# Altium PCB PCB1.PcbDoc (part 1 of 2)
Units mil, origin at the board's own origin, x right, y up, seen from the top; angles counter-clockwise.
Board outline 8460 x 6430 mil, 2 copper layers (Top Layer, Bottom Layer); 197 components, 213 nets, 804 pads, 61 vias.
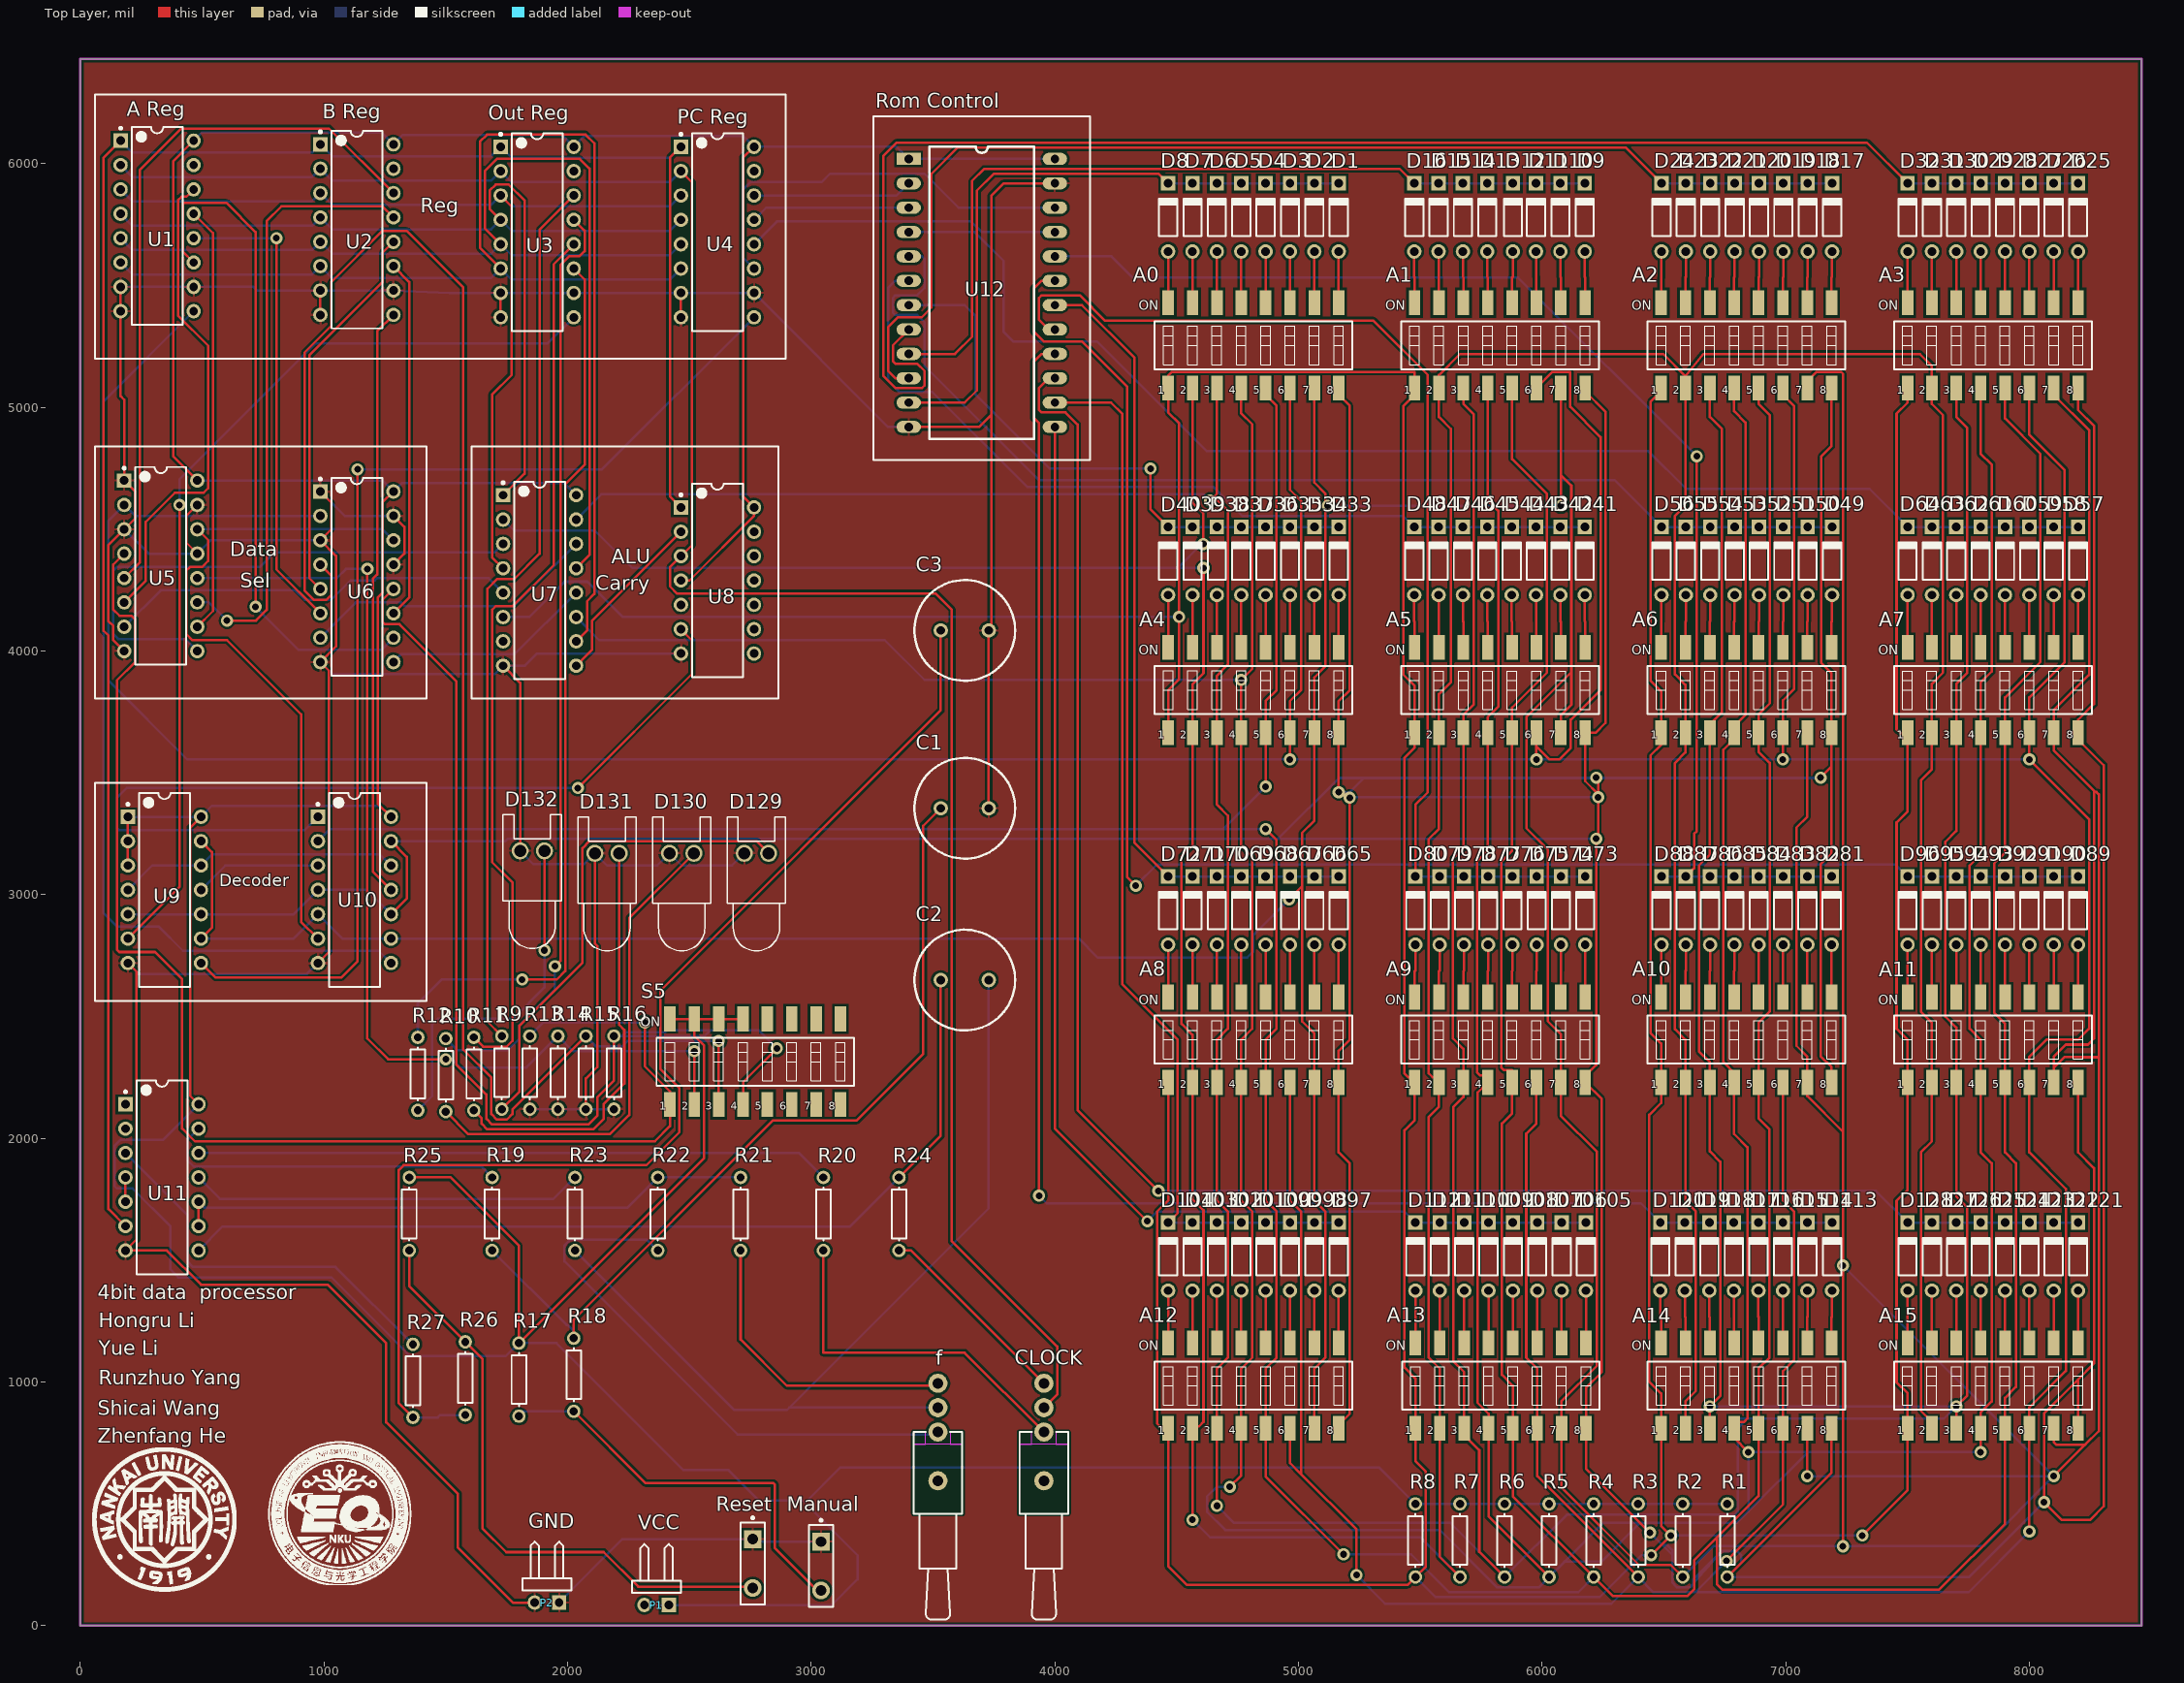
[diagram p0: Top Layer view]
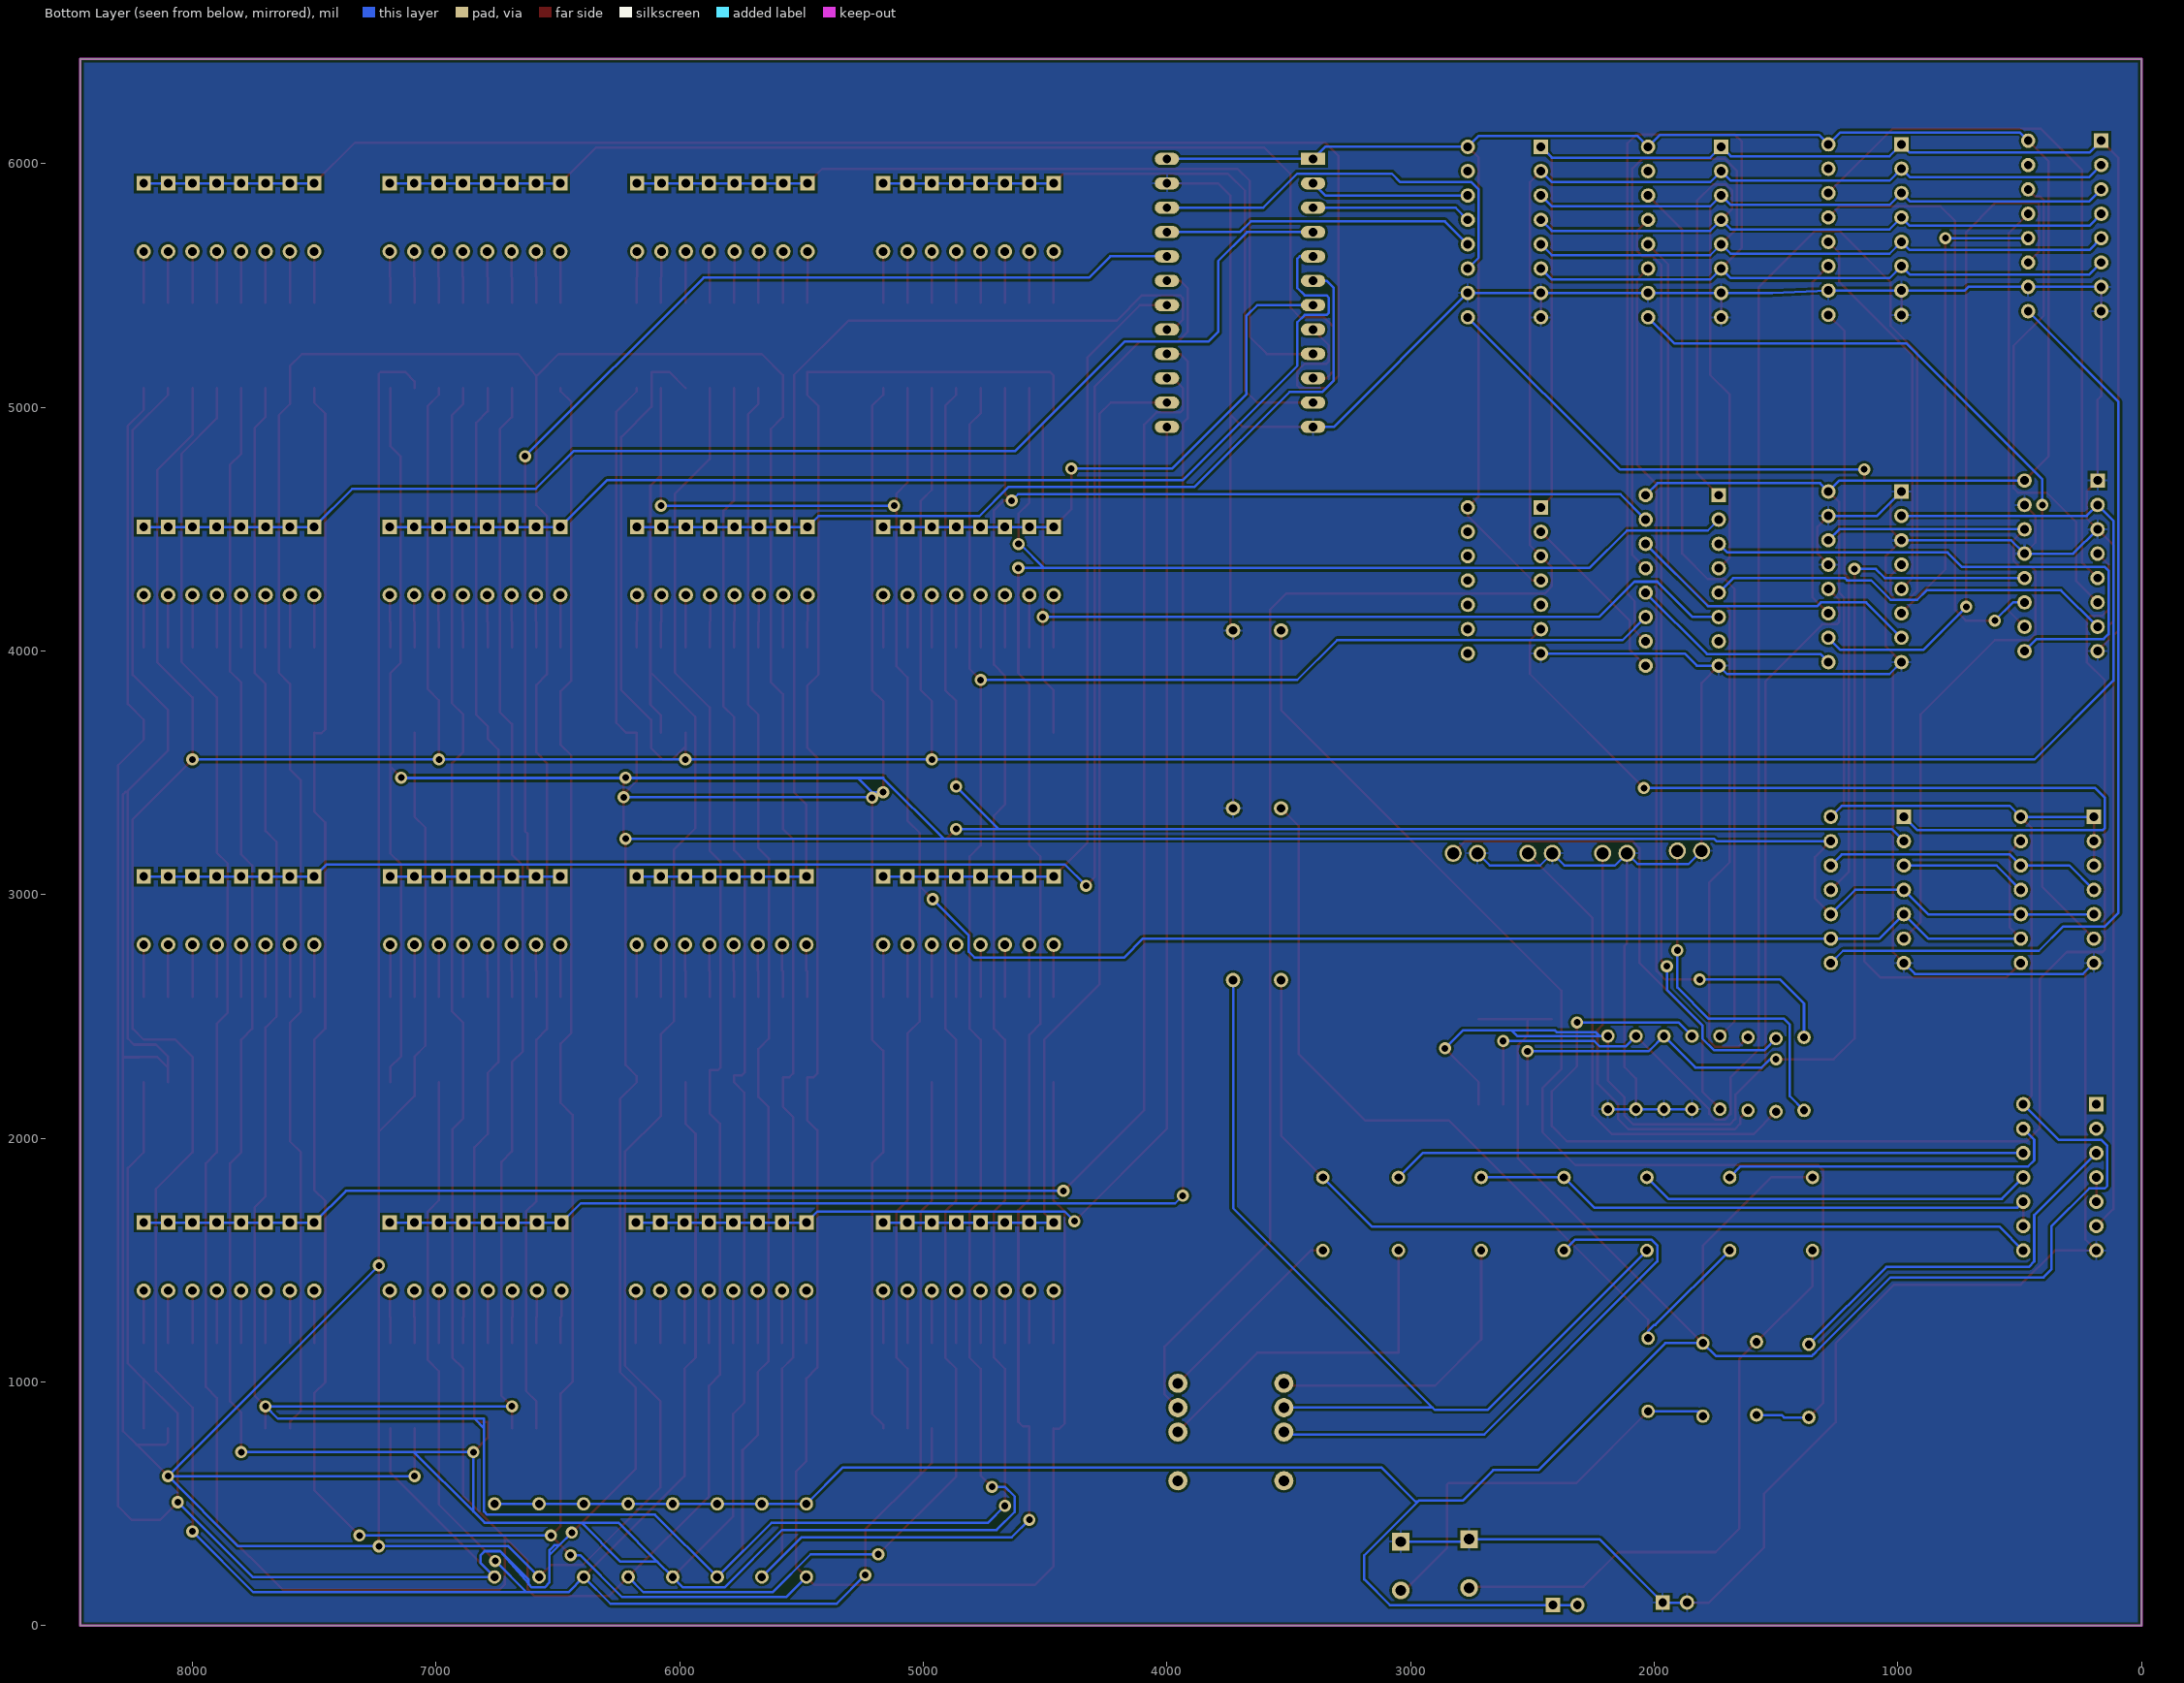
[diagram p1: Bottom Layer view, seen from below]

## Layer stack, top to bottom
Top Solder: solder mask 0.4, Solder Resist, Dk 3.5
Top Layer: signal copper 1.4
Dielectric 1: dielectric 12.6, FR-4, Dk 4.8
Bottom Layer: signal copper 1.4
Bottom Solder: solder mask 0.4, Solder Resist, Dk 3.5

## Board outline
0,0 8460,0 8460,6430 0,6430

## Design rules (kind name [scope] priority, off if disabled: settings)
Clearance [All] p1: gap=10 ignorepadtopadclearanceinfootprint=FALSE except(0: Arc-Hole Track-Hole SMDPad-Hole THPad-Hole Via-Hole Fill-Hole Poly-Hole Region-Hole Text-Hole)
MinimumSolderMaskSliver [All] p1: minsoldermaskwidth=5
PolygonConnect [All] p1: connectstyle=Relief reliefconductorwidth=10 reliefentries=4 polygonreliefangle="90 Angle" airgapwidth=10
RoutingVias [All] p1: holewidth=28 width=50 viastyle="Through Hole" minholewidth=28 minwidth=50 maxholewidth=28 maxwidth=50
SilkToSilkClearance [All] p1: silktosilkclearance=0
SilkToSolderMaskClearance [IsPad] p1: minsilkscreentomaskgap=3 clearancetoexposedcopper=TRUE
SolderMaskExpansion [All] p1: expansion=4
Width [All] p1: maxlimit=10 minlimit=10 preferedwidth=10
27 further rules are at their usual default settings.

## Components (designator, comment, footprint, x,y, rotation, side; value= is the part's Value field where it differs from the comment)
A0 "SW DIP-8" DIP_SW_8WAY_SMD 4815,5255 r0 top
A1 "SW DIP-8" DIP_SW_8WAY_SMD 5826.67,5255 r0 top
A2 "SW DIP-8" DIP_SW_8WAY_SMD 6838.33,5255 r0 top
A3 "SW DIP-8" DIP_SW_8WAY_SMD 7850,5255 r0 top
A4 "SW DIP-8" DIP_SW_8WAY_SMD 4815,3840.2 r0 top
A5 "SW DIP-8" DIP_SW_8WAY_SMD 5826.67,3840 r0 top
A6 "SW DIP-8" DIP_SW_8WAY_SMD 6838.33,3840 r0 top
A7 "SW DIP-8" DIP_SW_8WAY_SMD 7850,3840 r0 top
A8 "SW DIP-8" DIP_SW_8WAY_SMD 4815,2405.2 r0 top
A9 "SW DIP-8" DIP_SW_8WAY_SMD 5826.67,2405.2 r0 top
A10 "SW DIP-8" DIP_SW_8WAY_SMD 6838.33,2405.2 r0 top
A11 "SW DIP-8" DIP_SW_8WAY_SMD 7850,2405.2 r0 top
A12 "SW DIP-8" DIP_SW_8WAY_SMD 4815,985 r0 top
A13 "SW DIP-8" DIP_SW_8WAY_SMD 5830,985 r0 top
A14 "SW DIP-8" DIP_SW_8WAY_SMD 6838.33,985 r0 top
A15 "SW DIP-8" DIP_SW_8WAY_SMD 7850,985 r0 top
C1 "Cap Pol1" RB5-10.5 3630,3355 r0 top value=10uF
C2 "Cap Pol1" RB5-10.5 3630,2650 r0 top value=10uF
C3 "Cap Pol1" RB5-10.5 3630,4085 r0 top value=10uF
CLOCK "SW-SPDT" TL36WW15050 3955,795 r270 top (schematic designator S1)
D1 "Diode 1N4148" DO-35 5165,5780 r90 top
D2 "Diode 1N4148" DO-35 5065,5780 r90 top
D3 "Diode 1N4148" DO-35 4965,5780 r90 top
D4 "Diode 1N4148" DO-35 4865,5780 r90 top
D5 "Diode 1N4148" DO-35 4765,5780 r90 top
D6 "Diode 1N4148" DO-35 4665,5780 r90 top
D7 "Diode 1N4148" DO-35 4565,5780 r90 top
D8 "Diode 1N4148" DO-35 4465,5780 r90 top
D9 "Diode 1N4148" DO-35 6175,5780 r90 top
D10 "Diode 1N4148" DO-35 6075,5780 r90 top
D11 "Diode 1N4148" DO-35 5975,5780 r90 top
D12 "Diode 1N4148" DO-35 5880,5780 r90 top
D13 "Diode 1N4148" DO-35 5775,5780 r90 top
D14 "Diode 1N4148" DO-35 5675,5780 r90 top
D15 "Diode 1N4148" DO-35 5575,5780 r90 top
D16 "Diode 1N4148" DO-35 5475,5780 r90 top
D17 "Diode 1N4148" DO-35 7190,5780 r90 top
D18 "Diode 1N4148" DO-35 7090,5780 r90 top
D19 "Diode 1N4148" DO-35 6990,5780 r90 top
D20 "Diode 1N4148" DO-35 6890,5780 r90 top
D21 "Diode 1N4148" DO-35 6790,5780 r90 top
D22 "Diode 1N4148" DO-35 6690,5780 r90 top
D23 "Diode 1N4148" DO-35 6590,5780 r90 top
D24 "Diode 1N4148" DO-35 6490,5780 r90 top
D25 "Diode 1N4148" DO-35 8200,5780 r90 top
D26 "Diode 1N4148" DO-35 8100,5780 r90 top
D27 "Diode 1N4148" DO-35 8000,5780 r90 top
D28 "Diode 1N4148" DO-35 7900,5780 r90 top
D29 "Diode 1N4148" DO-35 7800,5780 r90 top
D30 "Diode 1N4148" DO-35 7700,5780 r90 top
D31 "Diode 1N4148" DO-35 7600,5780 r90 top
D32 "Diode 1N4148" DO-35 7500,5780 r90 top
D33 "Diode 1N4148" DO-35 5165,4370 r90 top
D34 "Diode 1N4148" DO-35 5065,4370 r90 top
D35 "Diode 1N4148" DO-35 4965,4370 r90 top
D36 "Diode 1N4148" DO-35 4865,4370 r90 top
D37 "Diode 1N4148" DO-35 4765,4370 r90 top
D38 "Diode 1N4148" DO-35 4665,4370 r90 top
D39 "Diode 1N4148" DO-35 4565,4370 r90 top
D40 "Diode 1N4148" DO-35 4465,4370 r90 top
D41 "Diode 1N4148" DO-35 6175,4370 r90 top
D42 "Diode 1N4148" DO-35 6075,4370 r90 top
D43 "Diode 1N4148" DO-35 5975,4370 r90 top
D44 "Diode 1N4148" DO-35 5875,4370 r90 top
D45 "Diode 1N4148" DO-35 5775,4370 r90 top
D46 "Diode 1N4148" DO-35 5675,4370 r90 top
D47 "Diode 1N4148" DO-35 5575,4370 r90 top
D48 "Diode 1N4148" DO-35 5475,4370 r90 top
D49 "Diode 1N4148" DO-35 7190,4370 r90 top
D50 "Diode 1N4148" DO-35 7090,4370 r90 top
D51 "Diode 1N4148" DO-35 6990,4370 r90 top
D52 "Diode 1N4148" DO-35 6890,4370 r90 top
D53 "Diode 1N4148" DO-35 6790,4370 r90 top
D54 "Diode 1N4148" DO-35 6690,4370 r90 top
D55 "Diode 1N4148" DO-35 6590,4370 r90 top
D56 "Diode 1N4148" DO-35 6490,4370 r90 top
D57 "Diode 1N4148" DO-35 8200,4370 r90 top
D58 "Diode 1N4148" DO-35 8100,4370 r90 top
D59 "Diode 1N4148" DO-35 8000,4370 r90 top
D60 "Diode 1N4148" DO-35 7900,4370 r90 top
D61 "Diode 1N4148" DO-35 7800,4370 r90 top
D62 "Diode 1N4148" DO-35 7700,4370 r90 top
D63 "Diode 1N4148" DO-35 7600,4370 r90 top
D64 "Diode 1N4148" DO-35 7500,4370 r90 top
D65 "Diode 1N4148" DO-35 5165,2935 r90 top
D66 "Diode 1N4148" DO-35 5065,2935 r90 top
D67 "Diode 1N4148" DO-35 4965,2935 r90 top
D68 "Diode 1N4148" DO-35 4865,2935 r90 top
D69 "Diode 1N4148" DO-35 4765,2935 r90 top
D70 "Diode 1N4148" DO-35 4665,2935 r90 top
D71 "Diode 1N4148" DO-35 4565,2935 r90 top
D72 "Diode 1N4148" DO-35 4465,2935 r90 top
D73 "Diode 1N4148" DO-35 6176.67,2935 r90 top
D74 "Diode 1N4148" DO-35 6077.14,2935 r90 top
D75 "Diode 1N4148" DO-35 5977.62,2935 r90 top
D76 "Diode 1N4148" DO-35 5878.1,2935 r90 top
D77 "Diode 1N4148" DO-35 5778.57,2935 r90 top
D78 "Diode 1N4148" DO-35 5679.05,2935 r90 top
D79 "Diode 1N4148" DO-35 5579.52,2935 r90 top
D80 "Diode 1N4148" DO-35 5480,2935 r90 top
D81 "Diode 1N4148" DO-35 7188.33,2935 r90 top
D82 "Diode 1N4148" DO-35 7088.57,2935 r90 top
D83 "Diode 1N4148" DO-35 6988.81,2935 r90 top
D84 "Diode 1N4148" DO-35 6889.05,2935 r90 top
D85 "Diode 1N4148" DO-35 6789.29,2935 r90 top
D86 "Diode 1N4148" DO-35 6689.52,2935 r90 top
D87 "Diode 1N4148" DO-35 6589.76,2935 r90 top
D88 "Diode 1N4148" DO-35 6490,2935 r90 top
D89 "Diode 1N4148" DO-35 8200,2935 r90 top
D90 "Diode 1N4148" DO-35 8100,2935 r90 top
D91 "Diode 1N4148" DO-35 8000,2935 r90 top
D92 "Diode 1N4148" DO-35 7900,2935 r90 top
D93 "Diode 1N4148" DO-35 7800,2935 r90 top
D94 "Diode 1N4148" DO-35 7700,2935 r90 top
D95 "Diode 1N4148" DO-35 7600,2935 r90 top
D96 "Diode 1N4148" DO-35 7500,2935 r90 top
D97 "Diode 1N4148" DO-35 5165,1515 r90 top
D98 "Diode 1N4148" DO-35 5065,1515 r90 top
D99 "Diode 1N4148" DO-35 4965,1515 r90 top
D100 "Diode 1N4148" DO-35 4865,1515 r90 top
D101 "Diode 1N4148" DO-35 4765,1515 r90 top
D102 "Diode 1N4148" DO-35 4665,1515 r90 top
D103 "Diode 1N4148" DO-35 4565,1515 r90 top
D104 "Diode 1N4148" DO-35 4465,1515 r90 top
D105 "Diode 1N4148" DO-35 6180,1515 r90 top
D106 "Diode 1N4148" DO-35 6080,1515 r90 top
D107 "Diode 1N4148" DO-35 5980,1515 r90 top
D108 "Diode 1N4148" DO-35 5880,1515 r90 top
D109 "Diode 1N4148" DO-35 5780,1515 r90 top
D110 "Diode 1N4148" DO-35 5680,1515 r90 top
D111 "Diode 1N4148" DO-35 5580,1515 r90 top
D112 "Diode 1N4148" DO-35 5480,1515 r90 top
D113 "Diode 1N4148" DO-35 7190,1515 r90 top
D114 "Diode 1N4148" DO-35 7089.29,1515 r90 top
D115 "Diode 1N4148" DO-35 6988.57,1515 r90 top
D116 "Diode 1N4148" DO-35 6887.86,1515 r90 top
D117 "Diode 1N4148" DO-35 6787.14,1515 r90 top
D118 "Diode 1N4148" DO-35 6686.43,1515 r90 top
D119 "Diode 1N4148" DO-35 6585.71,1515 r90 top
D120 "Diode 1N4148" DO-35 6485,1515 r90 top
D121 "Diode 1N4148" DO-35 8200,1515 r90 top
D122 "Diode 1N4148" DO-35 8100,1515 r90 top
D123 "Diode 1N4148" DO-35 8000,1515 r90 top
D124 "Diode 1N4148" DO-35 7900,1515 r90 top
D125 "Diode 1N4148" DO-35 7800,1515 r90 top
D126 "Diode 1N4148" DO-35 7700,1515 r90 top
D127 "Diode 1N4148" DO-35 7600,1515 r90 top
D128 "Diode 1N4148" DO-35 7500,1515 r90 top
D129 "LED0" LED-0 2775,3170 r0 top
D130 "LED0" LED-0 2468.33,3170 r0 top
D131 "LED0" LED-0 2161.67,3170 r0 top
D132 "LED0" LED-0 1855,3180 r0 top
f "SW-SPDT" TL36WW15050 3520,795 r270 top (schematic designator S2)
Manual "SW-PB" SPST-2 3040,245 r270 top (schematic designator S4)
P1 "Header 2H" HDR1X2H 2415,85 r180 top
P2 "Header 2H" HDR1X2H 1965,95 r180 top
R1 "Res1" AXIAL-0.3 6760,350 r90 top value=10K
R2 "Res1" AXIAL-0.3 6577.14,350 r90 top value=10K
R3 "Res1" AXIAL-0.3 6394.29,350 r90 top value=10K
R4 "Res1" AXIAL-0.3 6211.43,350 r90 top value=10K
R5 "Res1" AXIAL-0.3 6028.57,350 r90 top value=10K
R6 "Res1" AXIAL-0.3 5845.71,350 r90 top value=10K
R7 "Res1" AXIAL-0.3 5662.86,350 r90 top value=10K
R8 "Res1" AXIAL-0.3 5480,350 r90 top value=10K
R9 "Res1" AXIAL-0.3 1730,2270 r90 top value=1K
R10 "Res1" AXIAL-0.3 1500,2260 r90 top value=1K
R11 "Res1" AXIAL-0.3 1615,2265 r90 top value=1K
R12 "Res1" AXIAL-0.3 1385,2265 r90 top value=1K
R13 "Res1" AXIAL-0.3 1845,2270 r270 top value=1K
R14 "Res1" AXIAL-0.3 1960,2270 r270 top value=1K
R15 "Res1" AXIAL-0.3 2075,2270 r270 top value=1K
R16 "Res1" AXIAL-0.3 2190,2270 r270 top value=1K
R17 "Res1" AXIAL-0.3 1800,1010 r90 top value=1K
R18 "Res1" AXIAL-0.3 2025,1030 r270 top value=1K
R19 "Res1" AXIAL-0.3 1690,1690 r270 top value=1K
R20 "Res1" AXIAL-0.3 3050,1690 r90 top value=1K
R21 "Res1" AXIAL-0.3 2710,1690 r270 top value=1K
R22 "Res1" AXIAL-0.3 2370,1690 r270 top value=1K
R23 "Res1" AXIAL-0.3 2030,1690 r270 top value=1K
R24 "Res1" AXIAL-0.3 3360,1690 r90 top value=1K
R25 "Res1" AXIAL-0.3 1350,1690 r90 top value=1K
R26 "Res1" AXIAL-0.3 1580,1015 r90 top value=1K
R27 "Res1" AXIAL-0.3 1365,1005 r270 top value=1K
Reset "SW-PB" SPST-2 2760,255 r270 top (schematic designator S3)
S5 "SW DIP-8" DIP_SW_8WAY_SMD 2770,2315 r0 top
U1 "SN74HC161N" DIP-16 315,5745 r0 top
U2 "SN74HC161N" DIP-16 1135,5730 r0 top
U3 "SN74HC161N" DIP-16 1875,5720 r0 top
U4 "SN74HC161N" DIP-16 2615,5720 r0 top
U5 "SN74HC153N" DIP-16 330,4350 r0 top
U6 "SN74HC153N" DIP-16 1135,4305 r0 top
U7 "SN74HC283N" DIP-16 1885,4290 r0 top
U8 "SN74HC74N" DIP-14 2615,4290 r0 top
U9 "SN74HC10N" DIP-14 345,3020 r0 top
U10 "SN74HC32N" DIP-14 1125,3020 r0 top
U11 "SN74HC14N" DIP-14 335,1840 r0 top
U12 "CD4514" "DIP24 - duplicate" 3400,6020 r0 top

## Footprints (in the part's own frame and the unit in brackets; to place one, negate y for a bottom-side part, rotate by r counter-clockwise, add the part's x,y. Pads: shape width x height; smd on the part's side, far side on the other; paste and mask are expansions set on the pad)
AXIAL-0.3 [mm] "Axial Device, Thru-Hole; 2 Leads; 0.3 in Pin Spacing"
  round 1.4 hole 0.85: 1(-3.81,0) 2(3.81,0)
  silkscreen extent -2.77,-0.76 2.77,0.76
"DIP24 - duplicate" [mil]
  rect 100x50 hole 35: 1(0,0)
  oval 100x50 hole 35: 2(0,-100) 3(0,-200) 4(0,-300) 5(0,-400) 6(0,-500) 7(0,-600) 8(0,-700) 9(0,-800) 10(0,-900) 11(0,-1000) 12(0,-1100) 13(600,-1100) 14(600,-1000) 15(600,-900) 16(600,-800) 17(600,-700) 18(600,-600) 19(600,-500) 20(600,-400) 21(600,-300) 22(600,-200) 23(600,-100) 24(600,0)
  silkscreen extent 85,-1150 515,50
DIP-14 [mm] "DIP; 14 Leads; Row Spacing 7.62 mm; Pitch 2.54 mm"
  rect 1.5x1.5 hole 0.9: 1(-3.81,7.62)
  round 1.5 hole 0.9: 2(-3.81,5.08) 3(-3.81,2.54) 4(-3.81,0) 5(-3.81,-2.54) 6(-3.81,-5.08) 7(-3.81,-7.62) 8(3.81,-7.62) 9(3.81,-5.08) 10(3.81,-2.54) 11(3.81,0) 12(3.81,2.54) 13(3.81,5.08) 14(3.81,7.62)
  silkscreen extent -3.93,-10.1 2.65,10.1, body extent -3.6,-10.1 3.6,10.1, height 5.08
DIP-16 [mm] "DIP; 16 Leads; Row Spacing 7.62 mm; Pitch 2.54 mm"
  rect 1.5x1.5 hole 0.9: 1(-3.81,8.89)
  round 1.5 hole 0.9: 2(-3.81,6.35) 3(-3.81,3.81) 4(-3.81,1.27) 5(-3.81,-1.27) 6(-3.81,-3.81) 7(-3.81,-6.35) 8(-3.81,-8.89) 9(3.81,-8.89) 10(3.81,-6.35) 11(3.81,-3.81) 12(3.81,-1.27) 13(3.81,1.27) 14(3.81,3.81) 15(3.81,6.35) 16(3.81,8.89)
  silkscreen extent -3.93,-10.3 2.65,10.31, body extent -3.6,-10.28 3.6,10.28, height 5.08
DIP_SW_8WAY_SMD [mm] "DIP Switch; 16 Leads"
  rect 1.2x2.6 smd: 1(-8.89,-4.45) 2(-6.35,-4.45) 3(-3.81,-4.45) 4(-1.27,-4.45) 5(1.27,-4.45) 6(3.81,-4.45) 7(6.35,-4.45) 8(8.89,-4.45) 9(8.89,4.45) 10(6.35,4.45) 11(3.81,4.45) 12(1.27,4.45) 13(-1.27,4.45) 14(-3.81,4.45) 15(-6.35,4.45) 16(-8.89,4.45)
  silkscreen extent -10.29,-2.5 10.31,2.5
DO-35 [mm] "Diode, Axial; Body 3.8 x 1.9 mm (LxDia. max), Lead Dia. 0.53 mm (max)"
  round 1.5 hole 0.9: 1(-3.55,0)
  rect 1.5x1.5 hole 0.9: 2(3.55,0)
  silkscreen extent -1.95,-0.95 2.05,0.95
HDR1X2H [mm] "Connector; Header; 2 Position; Right Angle"
  rect 1.5x1.5 hole 0.9: 1(0,0)
  round 1.5 hole 0.9: 2(2.54,0)
  silkscreen extent -1.27,-6.35 3.81,-1.27
LED-0 [mil] "LED; 2 Leads"
  round 70 hole 50: 1(50,0) 2(-50,0)
  silkscreen extent -120,-400 120,150
RB5-10.5 [mm] "Capacitor (Radial); 2 Leads"
  round 1.5 hole 0.9: 1(-2.5,0) 2(2.5,0)
  silkscreen extent -5.25,-5.25 5.25,5.25
SPST-2 [mm] "Switch; 2 Leads"
  rect 1.85x1.85 hole 1.1: 1(-2.54,0)
  round 1.85 hole 1.1: 2(2.54,0)
  silkscreen extent -4.89,-1.27 4.28,1.27
TL36WW15050 [mm] "Switch; 4 Leads"
  round 2 hole 1.1: 1(0,0) 2(-2.54,0) 3(-5.08,0) M(5.08,0)
  Top Layer keep-out region: 1.27,2.54 1.27,-2.54 8.509,-2.54 8.509,2.54
  Top Layer keep-out region: 0,2.54 0,1.27 1.27,1.27 1.27,2.54
  Top Layer keep-out region: 0,-1.27 0,-2.54 1.27,-2.54 1.27,-1.27
  silkscreen extent 0,-2.54 19.56,2.54

## Part data
A0 A1 A2 A3 A4 A5 A6 A7 A8 A9 A10 A11 A12 A13 A14 A15 S5: "DIP Switch, 8 Position, SPST", LatestRevisionDate=17-Jul-2002, LatestRevisionNote="Re-released for DXP Platform.", PackageDescription="DIP Switch; 16 Leads", PackageReference=DIP_SW_8WAY_SMD, Published=24-Mar-1999, Publisher="Altium Limited"
C1 C2 C3: "Polarized Capacitor (Radial)", LatestRevisionDate=17-Jul-2002, LatestRevisionNote="Re-released for DXP Platform.", PackageDescription="Polarized Capacitor (Radial); 2 Leads", PackageReference=RB7.6-15, Published=8-Jun-2000, Publisher="Altium Limited"
CLOCK f: "SPDT Subminiature Toggle Switch, Right Angle Mounting, Vertical Actuation", ComponentLink1Description="Manufacturer Link", ComponentLink1URL=http://www.apem.com, DatasheetVersion=05-Dec-2000, LatestRevisionDate=17-Dec-2003, LatestRevisionNote="Schematic revised, PCB Footprint replaced.", PackageDescription="Switch; 4 Leads", PackageReference=TL36WW15050, Published=24-Mar-1999, Publisher="Altium Limited"
D1 D2 D3 D4 D5 D6 D7 D8 D9 D10 D11 D12 D13 D14 D15 D16 D17 D18 D19 D20 D21 D22 D23 D24 D25 D26 D27 D28 D29 D30 D31 D32 D33 D34 D35 D36 D37 D38 D39 D40 D41 D42 D43 D44 D45 D46 D47 D48 D49 D50 D51 D52 D53 D54 D55 D56 D57 D58 D59 D60 D61 D62 D63 D64 D65 D66 D67 D68 D69 D70 D71 D72 D73 D74 D75 D76 D77 D78 D79 D80 D81 D82 D83 D84 D85 D86 D87 D88 D89 D90 D91 D92 D93 D94 D95 D96 D97 D98 D99 D100 D101 D102 D103 D104 D105 D106 D107 D108 D109 D110 D111 D112 D113 D114 D115 D116 D117 D118 D119 D120 D121 D122 D123 D124 D125 D126 D127 D128: "High Conductance Fast Diode", Code_JEDEC=DO-204-AH, ComponentLink1Description="Manufacturer Link", ComponentLink1URL=http://www.fairchildsemi.com/, ComponentLink2Description=Datasheet, ComponentLink2URL=http://www.fairchildsemi.com/ds/1N%2F1N4148.pdf, DatasheetVersion=1997, LatestRevisionDate=17-Jul-2002, LatestRevisionNote="Re-released for DXP Platform.", PackageDescription="Diode, Axial; Body 3.8 x 1.9 mm (LxDia. max), Lead Dia. 0.53 mm (max)", PackageReference=DO-35, Published=8-Jun-2000, Publisher="Altium Limited"
D129 D130 D131 D132: "Typical INFRARED GaAs LED", LatestRevisionDate=08-Jul-2005, LatestRevisionNote="Mech Layer 1 removed.", PackageDescription="LED; 2 Leads", PackageReference=LED-0, Published=8-Jun-2000, Publisher="Altium Limited"
Manual Reset: "Switch", LatestRevisionDate=17-Jul-2002, LatestRevisionNote="Re-released for DXP Platform.", PackageDescription="Switch; 2 Leads", PackageReference=SPST-2, Published=24-Mar-1999, Publisher="Altium Limited"
P1 P2: "Header, 2-Pin, Right Angle", LatestRevisionDate=17-Jul-2002, LatestRevisionNote="Re-released for DXP Platform.", Publisher="Altium Limited"
R1 R2 R3 R4 R5 R6 R7 R8 R9 R10 R11 R12 R13 R14 R15 R16 R17 R18 R19 R20 R21 R22 R23 R24 R25 R26 R27: "Resistor", LatestRevisionDate=17-Jul-2002, LatestRevisionNote="Re-released for DXP Platform.", PackageDescription="Axial Device, Thru-Hole; 2 Leads; 0.3 in Pin Spacing", PackageReference=AXIAL-0.3, Published=8-Jun-2000, Publisher="Altium Limited"

## Via types
v1: diameter 50, hole 28, Top Layer to Bottom Layer, 61 vias

## Nets (pads, with @x,y where several pads share a name; then routed paths per layer and width w, separated by ;. In a path a pad name is that pad's centre, name@x,y a point inside that pad or via, vN(x,y) a via of type N, cw(c..) or ccw(c..) an arc to the next point about the centre after c; other vN are vias at no path point)
CLOCK: CLOCK.2 U1.2 U2.2 U3.2 U4.2 U8.3 | length 8841.4
  Top Layer w10: U4.2@2465,5970 2510,5925 2510,4435 U8.3@2465,4390 2420,4345 2420,4266 2450,4236 3511,4236 3577,4170 3577,1578 4009.37,1145.63 4009.37,949.37 CLOCK.2@3955,895
  Bottom Layer w10: U1.2@165,5995 214,5946 951,5946 U2.2@985,5980 1034,5931 1686,5931 U3.2@1725,5970 1770,5925 2420,5925 U4.2@2465,5970
Data0: U1.3 U2.3 U3.3 U4.3 U7.4 | length 4008.5
  Top Layer w10: U3.3@1725,5870 1770,5825 1770,5133 1690,5053 1690,4385 U7.4@1735,4340
  Bottom Layer w10: U1.3@165,5895 214,5846 951,5846 U2.3@985,5880 1034,5831 1686,5831 U3.3@1725,5870 1770,5825 2420,5825 U4.3@2465,5870
Data1: U1.4 U2.4 U3.4 U4.4 U7.1 | length 3973.5
  Top Layer w10: U3.4@1725,5770 1680,5815 1680,5890 1705,5915 1758,5915 1823,5850 1823,4728 U7.1@1735,4640
  Bottom Layer w10: U1.4@165,5795 214,5746 951,5746 U2.4@985,5780 1034,5731 1686,5731 U3.4@1725,5770 1770,5725 2420,5725 U4.4@2465,5770
Data2: U1.5 U2.5 U3.5 U4.5 U7.13 | length 4864.7
  Top Layer w10: U3.5@1725,5670 1660,5735 1660,5970 1710,6020 2050,6020 2089.53,5980.47 2089.53,4394.53 U7.13@2035,4340
  Bottom Layer w10: U1.5@165,5695 214,5646 951,5646 U2.5@985,5680 1034,5631 1686,5631 U3.5@1725,5670 1770,5625 2420,5625 U4.5@2465,5670
Data3: U1.6 U2.6 U3.6 U4.6 U7.10 | length 5535.9
  Top Layer w10: U3.6@1725,5570 1640,5655 1640,6091 1669,6120 2074,6120 2109.53,6084.47 2109.53,4234.53 2079.53,4204.53 2079.53,4084.53 U7.10@2035,4040
  Bottom Layer w10: U1.6@165,5595 214,5546 951,5546 U2.6@985,5580 1034,5531 1686,5531 U3.6@1725,5570 1770,5525 2420,5525 U4.6@2465,5570
Data_OUT_0: A0.1 A1.1 A2.1 A3.1 A4.1 A5.1 A6.1 A7.1 A8.1 A9.1 A10.1 A11.1 A12.1 A13.1 A14.1 A15.1 R8.1 U7.6 | length 25348.6
  Top Layer w10: A12.1@4465,809.8 A12.1@4465,809 ; A8.1@4465,2230 4465,1745 4420,1700 4420,830 4441,809 A12.1@4465,809 ; A4.1@4465,3665 4465,3840 4510,3885 v1(4510,4140) 4510,4935 4465,4980 A0.1@4465,5079.8 4465,5131 4480,5146 5476.67,5146 A1.1@5476.67,5079.8 5476.67,5052 5430,5005.33 5430,3904 5476.67,3857.33 A5.1@5476.67,3664.8 5476.67,3604 5435,3562.33 5435,2266 5450,2251 5476.67,2251 A9.1@5476.67,2230 5476.67,2075 5435,2033.33 5435,1060 5480,1015 A13.1@5480,809.8 5480,676 5523,633 5523,243 R8.1@5480,200 5447.21,167.21 4542.79,167.21 4465,245 A12.1@4465,809 ; v1(6447.67,289.33) v1(6528.33,370) 6488.33,410 A14.1@6488.33,809.8 6488.33,952.67 6440,1001 6440,2097 6488.33,2145.33 A10.1@6488.33,2230 6488.33,2389.67 6445,2433 6445,3571.67 6488.33,3615 A6.1@6488.33,3664.8 6488.33,3835.67 6445,3879 6445,5022.67 6488.33,5066 A2.1@6488.33,5079.8 ; v1(7314,370) 7500,556 A15.1@7500,809.8 7500,954 7455,999 7455,1744 7500,1789 A11.1@7500,2230 7500,2405 7455,2450 7455,3297 7500,3342 A7.1@7500,3664 ; A7.1@7500,3664.8 A7.1@7500,3664 ; A3.1@7500,5079.8 7500,5020 7455,4975 7455,3679 7470,3664 A7.1@7500,3664
  Bottom Layer w10: U7.6@1735,4140 1842,4140 1987,4285 2081,4285 2226,4140 v1(4510,4140) ; R8.1@5480,200 5562.56,117.44 6236.44,117.44 6408.33,289.33 v1(6447.67,289.33) ; v1(6528.33,370) v1(7314,370)
Data_OUT_1: A0.2 A1.2 A2.2 A3.2 A4.2 A5.2 A6.2 A7.2 A8.2 A9.2 A10.2 A11.2 A12.2 A13.2 A14.2 A15.2 R7.1 U7.2 | length 25123.5
  Top Layer w10: v1(4565,435) A12.2@4565,809.8 4565,818 4591,818 4610,837 4610,1705 4565,1750 A8.2@4565,2230 4565,2425 4520,2470 4520,3158 4565,3203 A4.2@4565,3665 4565,3864 4610,3909 v1(4610,4341) ; A0.2@4565,5079.8 4565,4609 4609.53,4564.47 4609.53,4440.53 v1(4609,4440) ; R7.1@5662.86,200 5580,282.86 A13.2@5580,809.8 5580,1055 5535,1100 5535,2088.33 5576.67,2130 A9.2@5576.67,2230 5576.67,2251 5550,2251 5534,2267 5534,3228 5576.67,3270.67 A5.2@5576.67,3664.8 5576.67,3823.67 5625,3872 5625,4912.67 5576.67,4961 A1.2@5576.67,5079.8 5576.67,5132.67 5663,5219 6497.33,5219 A2.2@6588.33,5128 ; A14.2@6588.33,809.8 6588.33,921 6631,963.67 6631,1700 6588.33,1742.67 A10.2@6588.33,2230 6588.33,2405 6545,2448.33 6545,3540.67 6588.33,3584 A6.2@6588.33,3664.8 6588.33,3861.67 6545,3905 6545,4555 6588.33,4598.33 A2.2@6588.33,5079.8 A2.2@6588.33,5128 ; A15.2@7600,809.8 7600,837 7555,882 7555,1943 7600,1988 A11.2@7600,2230 7600,2475 7555,2520 7555,3470 7600,3515 A7.2@7600,3664.8 7600,3866 7645,3911 7645,4969 7600,5014 A3.2@7600,5079.8 7600,5170 7551,5219 6661.33,5219 A2.2@6588.33,5128
  Bottom Layer w10: U7.2@1735,4540 1780,4495 2112,4495 2266,4341 4504,4341 ; v1(4565,435) 4637,363 5499.86,363 R7.1@5662.86,200 ; v1(4609,4440) 4603,4440 4504,4341 ; v1(4610,4341) 4504,4341
Data_OUT_2: A0.3 A1.3 A2.3 A3.3 A4.3 A5.3 A6.3 A7.3 A8.3 A9.3 A10.3 A11.3 A12.3 A13.3 A14.3 A15.3 R6.1 U7.15 | length 25956.1
  Top Layer w10: v1(4665,492) A12.3@4665,809.8 4665,1055 4710,1100 4710,1700 4665,1745 A8.3@4665,2230 4665,2405 4710,2450 4710,3325 4665,3370 A4.3@4665,3665 4665,3899 4710,3944 4710,4578 4670,4618 v1(4637,4618) 4665,4646 A0.3@4665,5079.8 ; A1.3@5676.67,5079.8 5676.67,5015 5720,4971.67 5720,3782.33 5676.67,3739 A5.3@5676.67,3664.8 5676.67,3191 5634,3148.33 5634,2410 5676.67,2367.33 A9.3@5676.67,2230 5676.67,2170 5635,2128.33 5635,1086 5680,1041 A13.3@5680,809.8 5680,782 5742,720 5742,303.71 R6.1@5845.71,200 ; A14.3@6688.33,809.8 v1(6688.33,900.33) 6731,943 6731,1904 6688.33,1946.67 A10.3@6688.33,2230 6688.33,2313.67 6644,2358 6644,3120 6688.33,3164.33 A6.3@6688.33,3664.8 6688.33,3700.33 6738,3750 6738,4911.33 6688.33,4961 A2.3@6688.33,5079.8 ; A15.3@7700,809.8 v1(7700,900.33) 7745,945.33 7745,1717 7700,1762 A11.3@7700,2230 7700,2455 7655,2500 7655,3217 7700,3262 A7.3@7700,3664.8 7700,3866 7745,3911 7745,4916 7700,4961 A3.3@7700,5079.8
  Bottom Layer w10: U7.15@2035,4540 2139,4644 4611,4644 v1(4637,4618) ; v1(4665,492) 4735,422 5623.71,422 R6.1@5845.71,200 6101.71,456 6790,456 6803,469 6803,611 6803,810 ; v1(6688.33,900.33) v1(7700,900.33) 7649.67,850 6843,850 ; 6803,810 6803,850 6843,850 ; 6803,810 6843,850
Data_OUT_3: A0.4 A1.4 A2.4 A3.4 A4.4 A5.4 A6.4 A7.4 A8.4 A9.4 A10.4 A11.4 A12.4 A13.4 A14.4 A15.4 R5.1 U7.11 | length 26171.6
  Top Layer w10: v1(4718,570) 4765,617 A12.4@4765,809.8 4765,1055 4810,1100 4810,1700 4765,1745 A8.4@4765,2230 4765,2405 4810,2450 4810,3157 4765,3202 A4.4@4765,3665 v1(4765,3882) 4810,3927 4810,4931 4765,4976 A0.4@4765,5079.8 ; A1.4@5776.67,5079.8 5776.67,4619.33 5820,4576 5820,3772.33 5776.67,3729 A5.4@5776.67,3664.8 5776.67,3182 5734,3139.33 5734,2270 5746,2258 5776.67,2258 A9.4@5776.67,2230 5735,2188.33 5735,915 5780,870 A13.4@5780,809.8 5780,448.57 R5.1@6028.57,200 ; A2.4@6788.33,5079.8 6788.33,4984.67 6835,4938 6835,3738.67 6788.33,3692 A6.4@6788.33,3664.8 6788.33,3640 6744,3595.67 6744,2313 6788.33,2268.67 A10.4@6788.33,2230 6788.33,2018 6843,1963.33 6843,850 6830,837 6788.33,837 A14.4@6788.33,809.8 6788.33,771 v1(6847,712.33) ; v1(7800,712.33) A15.4@7800,809.8 7800,875 7845,920 7845,1898 7800,1943 A11.4@7800,2230 7800,2405 7755,2450 7755,3120 7800,3165 A7.4@7800,3664.8 7800,3871 7845,3916 7845,4766 7800,4811 A3.4@7800,5079.8
  Bottom Layer w10: U7.11@2035,4140 2130,4045 3302,4045 3465,3882 v1(4765,3882) ; v1(4718,570) 4665,570 4625,530 4625,467 4699,393 5580,393 5815.56,157.44 5986.01,157.44 R5.1@6028.57,200 6091.57,263 ; v1(7800,712.33) 7090.33,712.33 ; 6091.57,263 6251.26,422.69 6402.66,422.69 ; 6091.57,263 6242.97,263 6402.66,422.69 ; 6402.66,422.69 6800.69,422.69 6847,469 ; 6847,469 7090.33,712.33 ; 6847,469 v1(6847,712.33) 7090.33,712.33
Data_OUT_4: A0.5 A1.5 A2.5 A3.5 A4.5 A5.5 A6.5 A7.5 A8.5 A9.5 A10.5 A11.5 A12.5 A13.5 A14.5 A15.5 R4.1 U10.2 | length 27320.5
  Top Layer w10: v1(4865,3270) 4910,3225 4910,2450 4865,2405 A8.5@4865,2230 4865,1745 4910,1700 4910,1100 4865,1055 A12.5@4865,809.8 4865,613 v1(5185,293) ; v1(4865,3444) A4.5@4865,3665 4865,3795 4910,3840 4910,5007 4865,5052 A0.5@4865,5079.8 ; A1.5@5876.67,5079.8 5876.67,4788 6020,4644.67 6020,3912 5876.67,3768.67 A5.5@5876.67,3664.8 5876.67,3181 5833,3137.33 5833,2290 5843,2280 5876.67,2280 A9.5@5876.67,2230 5876.67,2102.67 5835,2061 5835,1030 5880,985 A13.5@5880,809.8 5880,531.43 R4.1@6211.43,200 6290.43,121 6596,121 6624,149 6624,268 6717,361 ; A2.5@6888.33,5079.8 6888.33,5014.67 6935,4968 6935,3786.67 6888.33,3740 A6.5@6888.33,3664.8 6888.33,3587 6934,3541.33 6934,2521 6888.33,2475.33 A10.5@6888.33,2230 6888.33,2082 6933,2037.33 6933,1100 6888.33,1055.33 A14.5@6888.33,809.8 6888.33,532.33 6717,361 ; A3.5@7900,5079.8 7900,4955 8045,4810 8045,3955 7900,3810 A7.5@7900,3664.8 7900,3173 7855,3128 7855,2516 7900,2471 A11.5@7900,2230 7900,1943 7945,1898 7945,980 7900,935 A15.5@7900,809.8 7900,418 7630,148 6739,148 6717,170 6717,361
  Bottom Layer w10: U10.2@975,3220 1025,3270 4691,3270 ; v1(4865,3270) 4691,3270 ; v1(4865,3444) 4691,3270 ; v1(5185,293) 5462.44,293 5618,137.44 6148.87,137.44 R4.1@6211.43,200
Data_OUT_5: A0.6 A1.6 A2.6 A3.6 A4.6 A5.6 A6.6 A7.6 A8.6 A9.6 A10.6 A11.6 A12.6 A13.6 A14.6 A15.6 R3.1 U5.2 U6.2 | length 30735.5
  Top Layer w10: A12.6@4965,809.8 4965,668 5010,623 ; A8.6@4965,2230 4965,1745 5010,1700 5010,623 ; v1(4965,3555) A4.6@4965,3665 4965,3795 5010,3840 5010,4617 4965,4662 A0.6@4965,5079.8 ; v1(5238,208) 5238,395 5010,623 ; A9.6@5976.67,2230 5976.67,2061 5935,2019.33 5935,1100 5980,1055 A13.6@5980,809.8 5980,614.29 R3.1@6394.29,200 ; v1(5976.67,3555) 5976.67,3608.33 ; A5.6@5976.67,3664.8 5976.67,3608.33 ; A1.6@5976.67,5079.8 6042.85,5145.99 6115.29,5145.99 6115.29,5003 6240,4878.29 6240,3840 6118,3718 6118,3603 6070,3555 6030,3555 5976.67,3608.33 ; v1(6757,266) 6988.33,497.33 A14.6@6988.33,809.8 6988.33,1044.33 7034,1090 7034,1700 6988.33,1745.67 A10.6@6988.33,2230 ; v1(6988.33,3555) A6.6@6988.33,3664.8 6988.33,3798.33 7035,3845 7035,5005.33 6988.33,5052 A2.6@6988.33,5079.8 ; v1(8000,387) A15.6@8000,809.8 8000,896 8150,1046 8150,1793 8000,1943 A11.6@8000,2230 8000,2335 8070,2405 8200,2405 8245,2450 8245,3310 v1(8000,3555) A7.6@8000,3664.8 8000,3810 8145,3955 8145,4743 8000,4888 A3.6@8000,5079.8
  Bottom Layer w10: U6.2@985,4555 225,4555 U5.2@180,4600 115,4535 115,3879 439,3555 v1(4965,3555) v1(5976.67,3555) 6118,3555 ; v1(5238,208) 5356,90 6284.29,90 R3.1@6394.29,200 6456.85,137.44 6628.44,137.44 ; v1(6757,266) 6628.44,137.44 ; v1@6973.33,3555 6118,3555 ; v1(8000,387) 7750.44,137.44 6628.44,137.44 ; v1(8000,3555) v1(6988.33,3555) 6118,3555
Data_OUT_6: A0.7 A1.7 A2.7 A3.7 A4.7 A5.7 A6.7 A7.7 A8.7 A9.7 A10.7 A11.7 A12.7 A13.7 A14.7 A15.7 R2.1 U9.9 U9.13 U10.5 U10.9 | length 33874
  Top Layer w10: U9.9@495,2820 540,2865 540,3175 U9.13@495,3220 ; v1(4962,2982) 5015,3035 ; A12.7@5065,809.8 5065,1055 5110,1100 5110,1700 5065,1745 A8.7@5065,2230 5065,2430 5015,2480 5015,3035 ; A0.7@5065,5079.8 5065,4692 5110,4647 v1@5110,4597 ; v1(5120,4597) v1@5110,4597 ; A5.7@6076.67,3664.8 6076.67,3736.67 6120,3780 6120,3914 ; v1(6076.67,4597) 6076.67,4722.33 ; A1.7@6076.67,5079.8 6076.67,4722.33 ; R2.1@6577.14,200 6527.81,249.33 6397.67,249.33 6080,567 A13.7@6080,809.8 6080,922 6225,1067 6225,1944.67 6076.67,2093 A9.7@6076.67,2230 6076.67,2428 6023,2481.67 6023,3186 5936,3273 5936,3730 6120,3914 ; v1(7088.33,613.53) A14.7@7088.33,809.8 ; A6.7@7088.33,3664.8 7088.33,3320 7044,3275.67 7044,2380 7088.33,2335.67 A10.7@7088.33,2230 7088.33,2173.67 7235,2027 ; A2.7@7088.33,5079.8 7088.33,5107 7127.32,5145.99 7227,5145.99 7235,5137.99 7235,2027 ; v1(7235,326) v1(7235,1478.53) 7235,2027 ; v1(8100,613.53) 8229.47,743 ; A15.7@8100,809.8 8100,753 8110,743 8229.47,743 ; A11.7@8100,2230 8100,2290 ; A3.7@8100,5079.8 8100,5052 8245,4907 8245,3903 8100,3758 A7.7@8100,3664.8 8100,3592 8265,3427 8265,3422 ; 5015,3035 5015,3254 5065,3304 A4.7@5065,3665 5065,3892 5110,3937 v1@5110,4597 ; 6076.67,4722.33 6120,4679 6120,3914 ; 8100,2290 8100,2335 8150,2385 8240,2385 8265,2410 8265,3422 ; 8100,2290 8145,2335 ; 8145,2335 8280,2335 8285,2330 ; 8145,2335 8285,2330 ; 8229.47,743 8285,798.53 8285,2330 ; 8265,3422 8275,3422 8285,3412 8285,2330
  Bottom Layer w10: U9.9@495,2820 875,2820 U10.5@975,2920 1075,2820 U10.9@1275,2820 4098,2820 4175,2743 4790,2743 4813,2766 4813,2833 v1(4962,2982) ; v1(5120,4597) 5160,4597 v1(6076.67,4597) ; R2.1@6577.14,200 6703.14,326 7121,326 v1(7235,326) 7812.47,326 v1(8100,613.53) ; v1(7088.33,613.53) v1(8100,613.53) ; v1(7235,1478.53) v1(8100,613.53)
Data_OUT_7: A0.8 A1.8 A2.8 A3.8 A4.8 A5.8 A6.8 A7.8 A8.8 A9.8 A10.8 A11.8 A12.8 A13.8 A14.8 A15.8 R1.1 U9.5 U9.10 U10.4 U10.10 U10.13 | length 36534.3
  Top Layer w10: U10.10@1275,2920 1339.53,2984.53 1339.53,3155.47 U10.13@1275,3220 ; A12.8@5165,809.8 5165,825 5210,870 5210,1898 5165,1943 A8.8@5165,2230 5165,2360 5210,2405 v1(5210,3398.19) ; v1(5165,3421) A4.8@5165,3665 5165,3795 5210,3840 5210,5007 5165,5052 A0.8@5165,5079.8 ; A1.8@6176.67,5079.8 6176.67,5066 6260,4982.67 6260,3705 6219.8,3664.8 A5.8@6176.67,3664.8 6176.67,3466.33 6230,3413 v1(6230,3400) ; v1(6222,3481) 6230,3473 v1(6230,3400) ; v1(6443,382) 6180,645 A13.8@6180,809.8 6180,976 6245,1041 6245,2161.67 A9.8@6176.67,2230 6176.67,2256 6222,2301.33 v1(6222,3230) 6230,3238 v1(6230,3400) ; R1.1@6760,200 7188.33,628.33 A14.8@7188.33,809.8 ; v1(7143,3481) 7188.33,3526.33 ; A10.8@7188.33,2230 7188.33,2292.67 7143,2338 7143,3124.67 7188.33,3170 7188.33,3526.33 ; A2.8@7188.33,5079.8 7188.33,4841.33 7145,4798 7145,3953 7188.33,3909.67 A6.8@7188.33,3664.8 7188.33,3526.33 ; A15.8@8200,809.8 8200,1011 ; A11.8@8200,2230 8200,1943 8265,1878 8265,1076 8200,1011 ; A3.8@8200,5079.8 8200,4990 8265,4925 8265,3783 8200,3718 A7.8@8200,3664.8 8200,3637 8305,3532 8305,490 8250,435 8132,435 v1(8060,507) 8060,871 8200,1011
  Bottom Layer w10: U9.5@195,2920 U9.10@495,2920 875,2920 U10.4@975,3020 1175,3020 U10.10@1275,2920 ; U10.13@1275,3220 1745,3220 1755,3230 4917,3230 ; v1(5165,3421) v1@5210,3421 ; 5165,3481 5165,3478 ; v1(5210,3398.19) v1@5210,3421 ; v1(6222,3230) 4917,3230 ; v1(6230,3400) 5231,3400 v1@5210,3421 ; v1(6443,382) 6495,330 ; v1(8060,507) 7753,200 R1.1@6760,200 6817,257 6817,290 6801,306 6737,306 ; 4917,3230 5165,3478 ; 5165,3478 5210,3478 ; 5165,3478 5168,3481 5210,3481 ; v1@5210,3421 5267,3478 ; 5210,3478 5211.16,3478 ; 5210.01,3478 5211.16,3478 ; 5210,3478 5210,3481 ; 5210,3481 5270,3481 ; 5211.16,3478 5267.09,3478.09 ; 5211.16,3478 5267,3478 ; 5267,3478 5267.09,3478.09 ; 5267,3478 7140,3478 v1(7143,3481) ; 5267.09,3478.09 5270,3481 ; 5267.09,3478.09 6222,3479.57 v1(7143,3481) ; 5270,3481 v1(6222,3481) v1(7143,3481) ; 6495,330 6534,291 ; 6495,330 6514,330 6534,310 6534,291 ; 6534,291 6534,178 6554.56,157.44 6607.14,157.44 ; 6607.14,157.44 6619.7,171.81 ; 6607.14,157.44 6619.7,170 6619.7,171.81 ; 6619.7,171.81 6737,306 ; 6619.7,171.81 6619.7,188.7 6737,306
GND: C1.2 C3.2 D129.2 D130.2 D131.2 D132.2 Manual.1 P2.1 P2.2 R13.2 R14.2 R15.2 R16.2 Reset.1 U1.7 U1.8 U1.10 U2.7 U2.8 U2.10 U3.7 U3.8 U3.10 U4.7 U4.8 U4.10 U5.1 U5.3 U5.8 U5.13 U5.15 U6.1 U6.3 U6.8 U6.13 U6.15 U7.8 U8.7 U9.7 U10.7 U11.7 U12.12 U12.23 | length 22982.6
  Top Layer w10: U1.7@165,5495 U1.8@165,5395 165,5047 180,5032 U5.1@180,4700 224.53,4655.47 224.53,4544.53 U5.3@180,4500 115.47,4435.47 115.47,4122.67 135,4103.14 135,4045 U5.8@180,4000 ; U9.7@195,2720 230,2685 230,1585 U11.7@185,1540 355,1540 495,1400 1015,1400 1255,1160 1255,835 1550,540 1550,320 1775,95 P2.2@1865,95 ; U5.13@480,4400 435,4445 435,4555 U5.15@480,4600 ; U10.7@975,2720 1020,2765 1020,3920 U6.8@985,3955 1049.53,4019.53 1049.53,4390.47 U6.3@985,4455 1030,4500 1030,4610 U6.1@985,4655 ; U2.8@985,5380 U2.7@985,5480 ; U6.13@1285,4355 1330,4400 1330,4510 U6.15@1285,4555 ; U3.8@1725,5370 U3.7@1725,5470 ; U7.8@1735,3940 1805,3870 D132.2@1805,3180 ; R15.2@2075,2120 2075,2246 2122,2293 2122,2789.67 2111.67,2800 D131.2@2111.67,3170 ; U4.8@2465,5370 U4.7@2465,5470 ; U12.12@3400,4920 3689,4920 3739,4970 ; C1.2@3728.43,3355 C3.2@3728.43,4085 3739,4085 3739,4970 ; U12.23@4000,5920 3790,5920 3739,5869 3739,4970
  Bottom Layer w10: U1.7@165,5495 U1.10@465,5495 710,5495 725,5480 U2.7@985,5480 U2.10@1285,5480 1515,5470 U3.7@1725,5470 U3.10@2025,5470 U4.7@2465,5470 U4.10@2765,5470 3315,4920 U12.12@3400,4920 ; U5.3@180,4500 280,4400 U5.13@480,4400 535,4455 U6.3@985,4455 ; U9.7@195,2720 240,2675 930,2675 U10.7@975,2720 ; U6.8@985,3955 1034,3906 1701,3906 U7.8@1735,3940 1825,3940 1875,3990 U8.7@2465,3990 ; U6.1@985,4655 1085,4555 U6.15@1285,4555 ; D132.2@1805,3180 1859,3126 2067.67,3126 D131.2@2111.67,3170 2161.67,3120 2368.33,3120 D130.2@2418.33,3170 2468.33,3120 2675,3120 D129.2@2725,3170 ; R13.2@1845,2120 R14.2@1960,2120 R15.2@2075,2120 R16.2@2190,2120 ; P2.2@1865,95 P2.1@1965,95 2225,355 Reset.1@2760,355 2770,345 Manual.1@3040,345 ; Reset.1@2760,360 Reset.1@2770,360
LOAD0': U1.9 U10.8 | length 3888.2
  Bottom Layer w10: U1.9@465,5395 95,5025 95,2925 150,2870 321,2870 421,2770 1225,2770 U10.8@1275,2720
LOAD1': U2.9 U10.11 | length 2425.9
  Top Layer w10: U10.11@1275,3020 1200.47,3094.53 1200.47,4297 1218,4314.53 1218,5313 U2.9@1285,5380
LOAD2': U3.9 U9.6 | length 3866.3
  Top Layer w10: U9.6@195,2820 407,3032 v1(407,4600)
  Bottom Layer w10: v1(407,4600) 407,4705 964,5262 1917,5262 U3.9@2025,5370
LOAD3': U4.9 U9.8 | length 4599.5
  Top Layer w10: U9.8@495,2720 555,2660 1070,2660 1137.8,2727.8 v1(1137.8,4745.8)
  Bottom Layer w10: v1(1137.8,4745.8) 2140.8,4745.8 U4.9@2765,5370
NetA0_9: A0.9 D1.1 | length 210
  Top Layer w10: A0.9@5165,5430.2 D1.1@5165,5640.24
NetA0_10: A0.10 D2.1 | length 210
  Top Layer w10: A0.10@5065,5430.2 D2.1@5065,5640.24
NetA0_11: A0.11 D3.1 | length 210
  Top Layer w10: A0.11@4965,5430.2 D3.1@4965,5640.24
NetA0_12: A0.12 D4.1 | length 210
  Top Layer w10: A0.12@4865,5430.2 D4.1@4865,5640.24
NetA0_13: A0.13 D5.1 | length 210
  Top Layer w10: A0.13@4765,5430.2 D5.1@4765,5640.24
NetA0_14: A0.14 D6.1 | length 210
  Top Layer w10: A0.14@4665,5430.2 D6.1@4665,5640.24
NetA0_15: A0.15 D7.1 | length 210
  Top Layer w10: A0.15@4565,5430.2 D7.1@4565,5640.24
NetA0_16: A0.16 D8.1 | length 210
  Top Layer w10: A0.16@4465,5430.2 D8.1@4465,5640.24
NetA1_9: A1.9 D9.1 | length 210.7
  Top Layer w10: D9.1@6175,5640.24 6175,5535.67 6176.67,5534 A1.9@6176.67,5430.2
NetA1_10: A1.10 D10.1 | length 210.7
  Top Layer w10: D10.1@6075,5640.24 6075,5535.67 6076.67,5534 A1.10@6076.67,5430.2
NetA1_11: A1.11 D11.1 | length 210.7
  Top Layer w10: D11.1@5975,5640.24 5975,5535.67 5976.67,5534 A1.11@5976.67,5430.2
NetA1_12: A1.12 D12.1 | length 211.4
  Top Layer w10: A1.12@5876.67,5430.2 5876.67,5533 5880,5536.33 D12.1@5880,5640.24
NetA1_13: A1.13 D13.1 | length 210.7
  Top Layer w10: D13.1@5775,5640.24 5775,5535.67 5776.67,5534 A1.13@5776.67,5430.2
NetA1_14: A1.14 D14.1 | length 210.7
  Top Layer w10: D14.1@5675,5640.24 5675,5535.67 5676.67,5534 A1.14@5676.67,5430.2
NetA1_15: A1.15 D15.1 | length 210.7
  Top Layer w10: D15.1@5575,5640.24 5575,5535.67 5576.67,5534 A1.15@5576.67,5430.2
NetA1_16: A1.16 D16.1 | length 210.7
  Top Layer w10: D16.1@5475,5640.24 5475,5535.67 5476.67,5534 A1.16@5476.67,5430.2
NetA2_9: A2.9 D17.1 | length 210.7
  Top Layer w10: A2.9@7188.33,5430.2 7188.33,5534 7190,5535.67 D17.1@7190,5640.24